# Altium PCB LISN_Mate.PcbDoc
Units mm, origin at the board's own origin, x right, y up, seen from the top; angles counter-clockwise.
Board outline 25 x 54.5 mm, 6 copper layers (Top Layer, Int1 (GND), Int2 (GND), Int3 (GND), Int4 (GND), Bottom Layer), stack 1.546 mm thick; 5 components, 5 nets, 26 pads, 1184 vias.
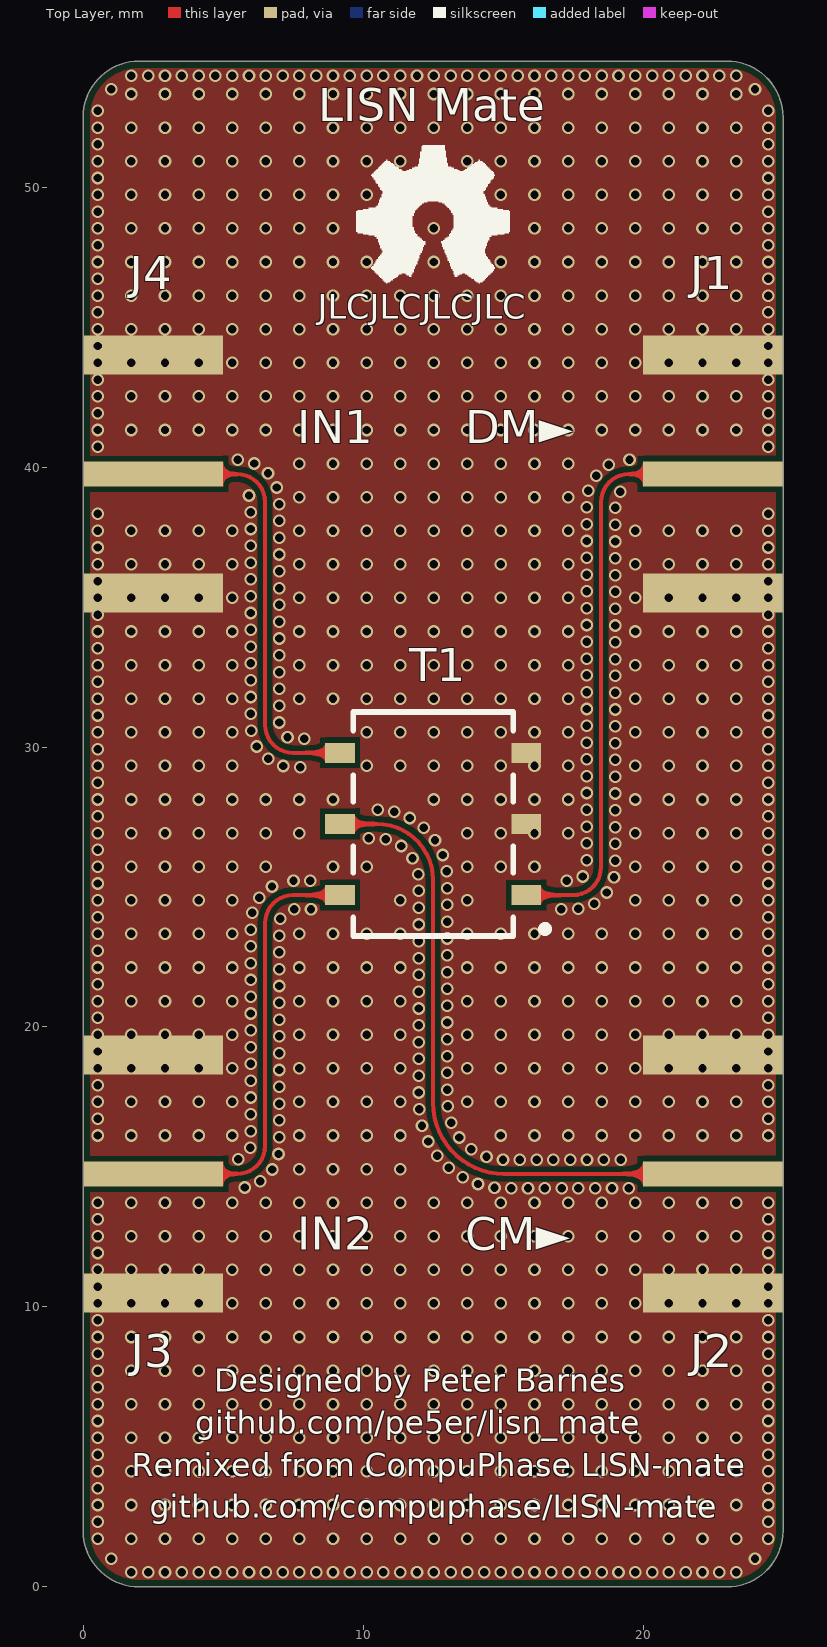
[diagram p0: Top Layer view]
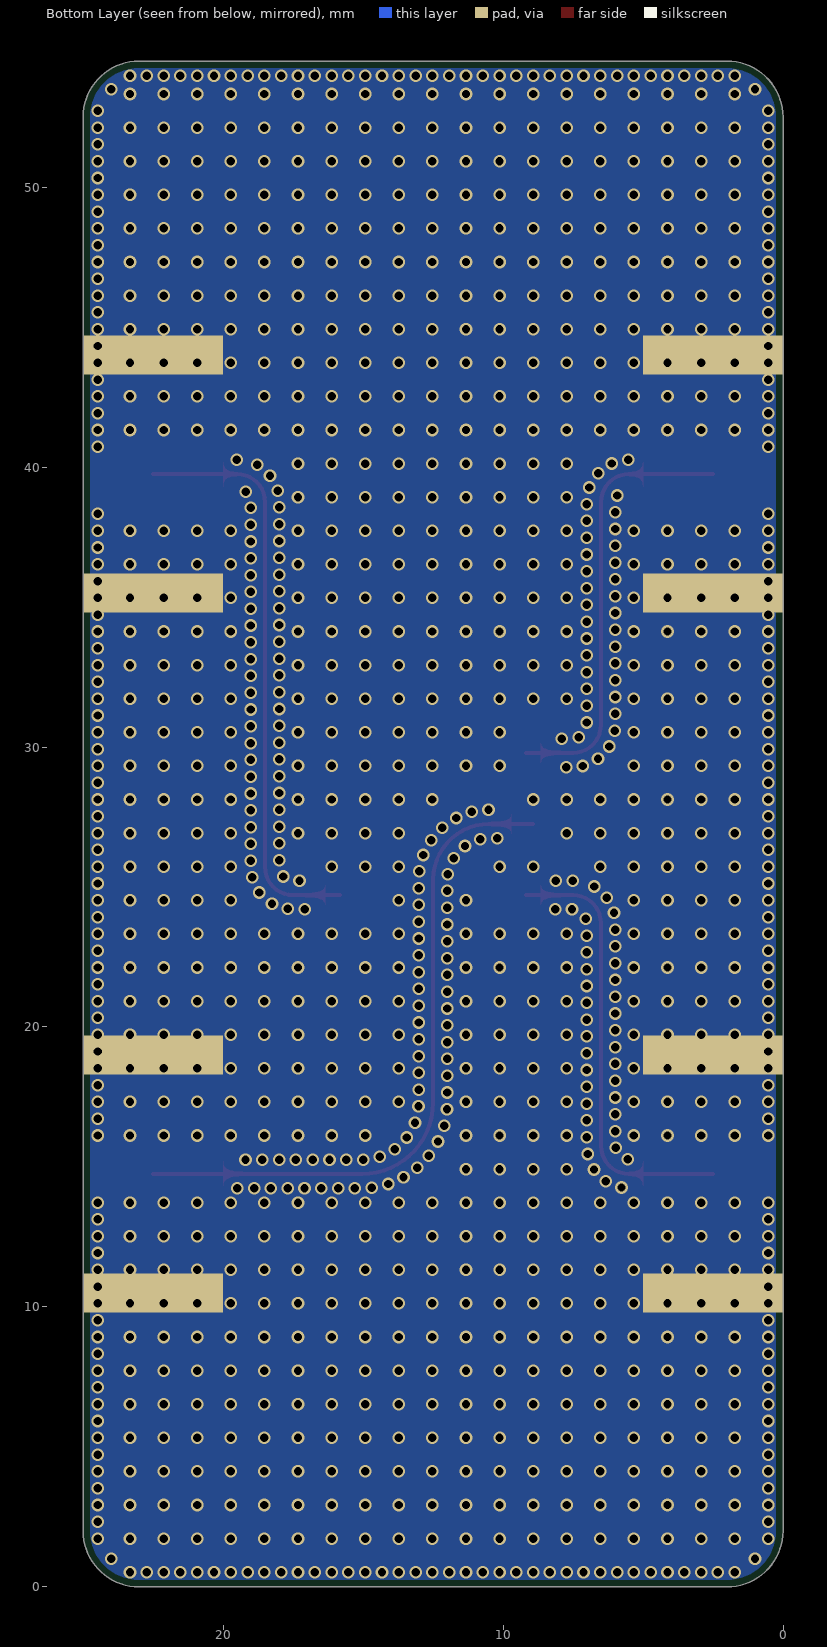
[diagram p1: Bottom Layer view, seen from below]
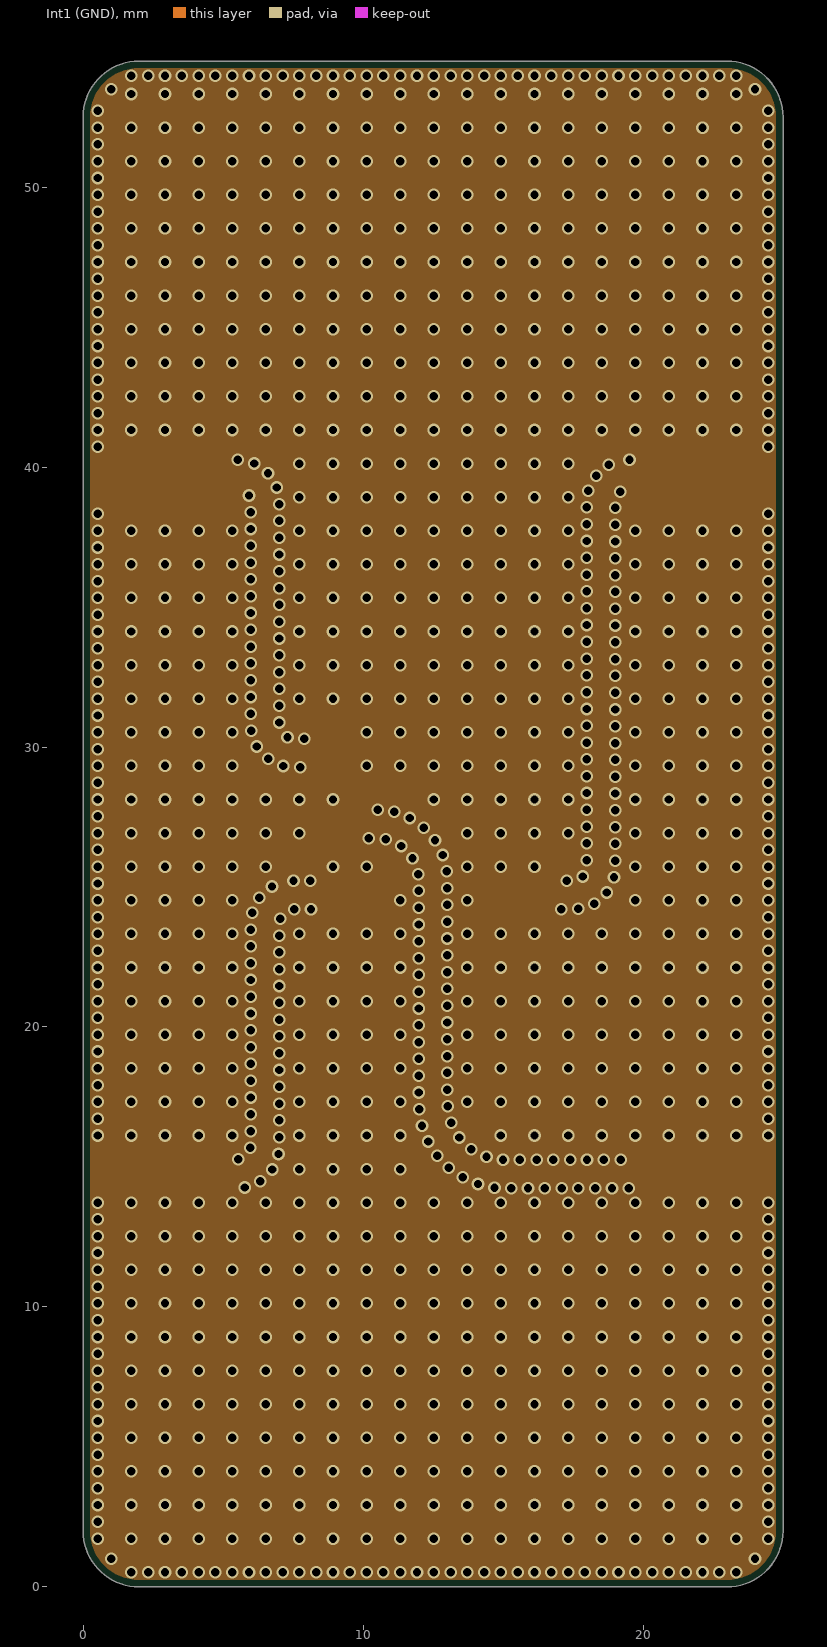
[diagram p2: Int1 (GND)]
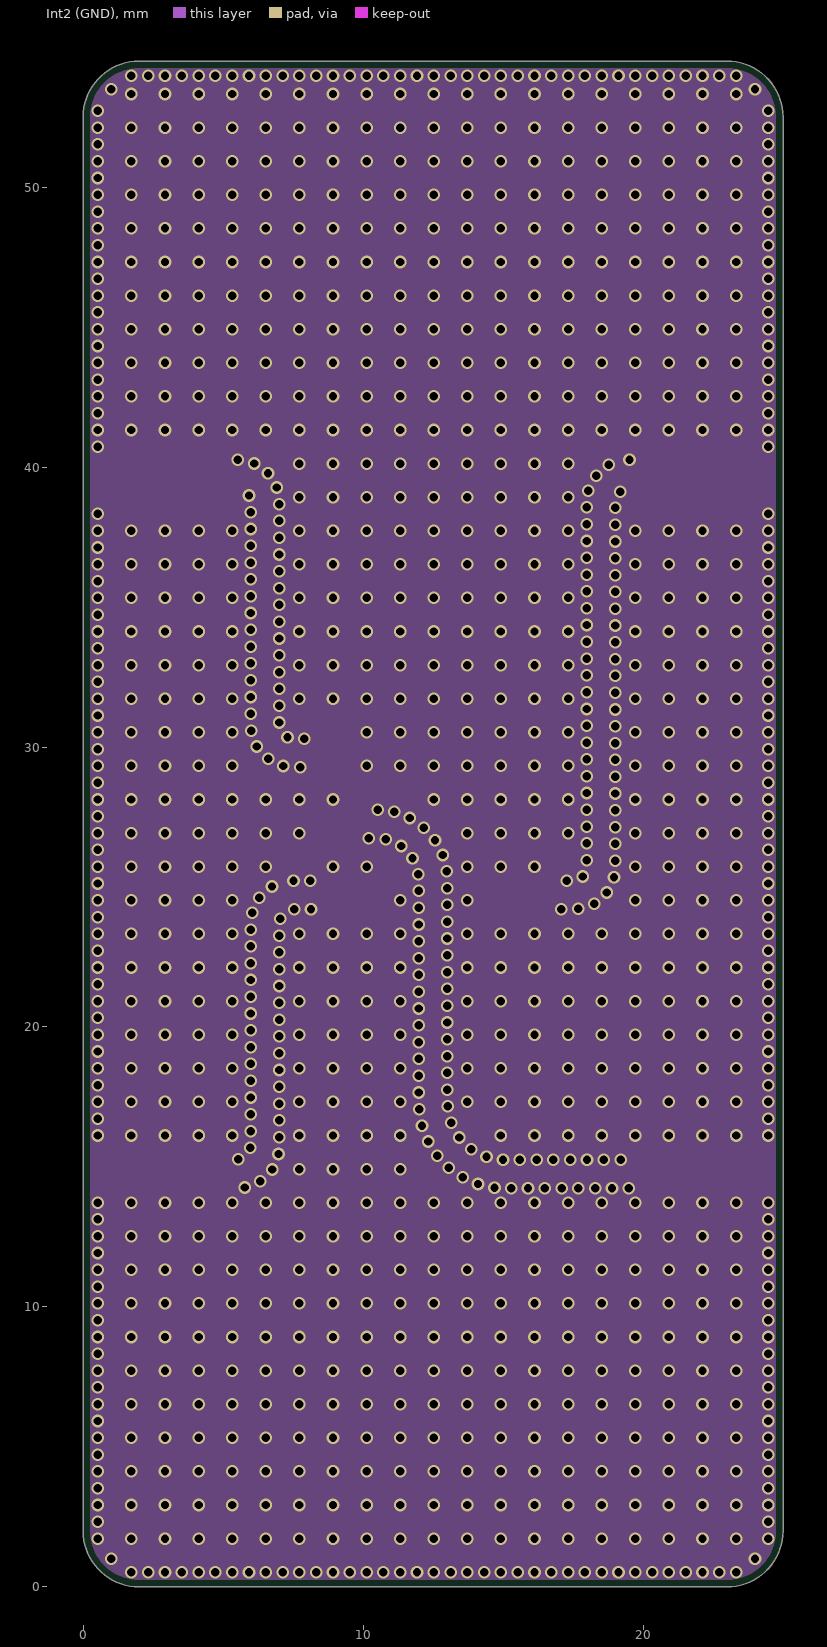
[diagram p3: Int2 (GND)]
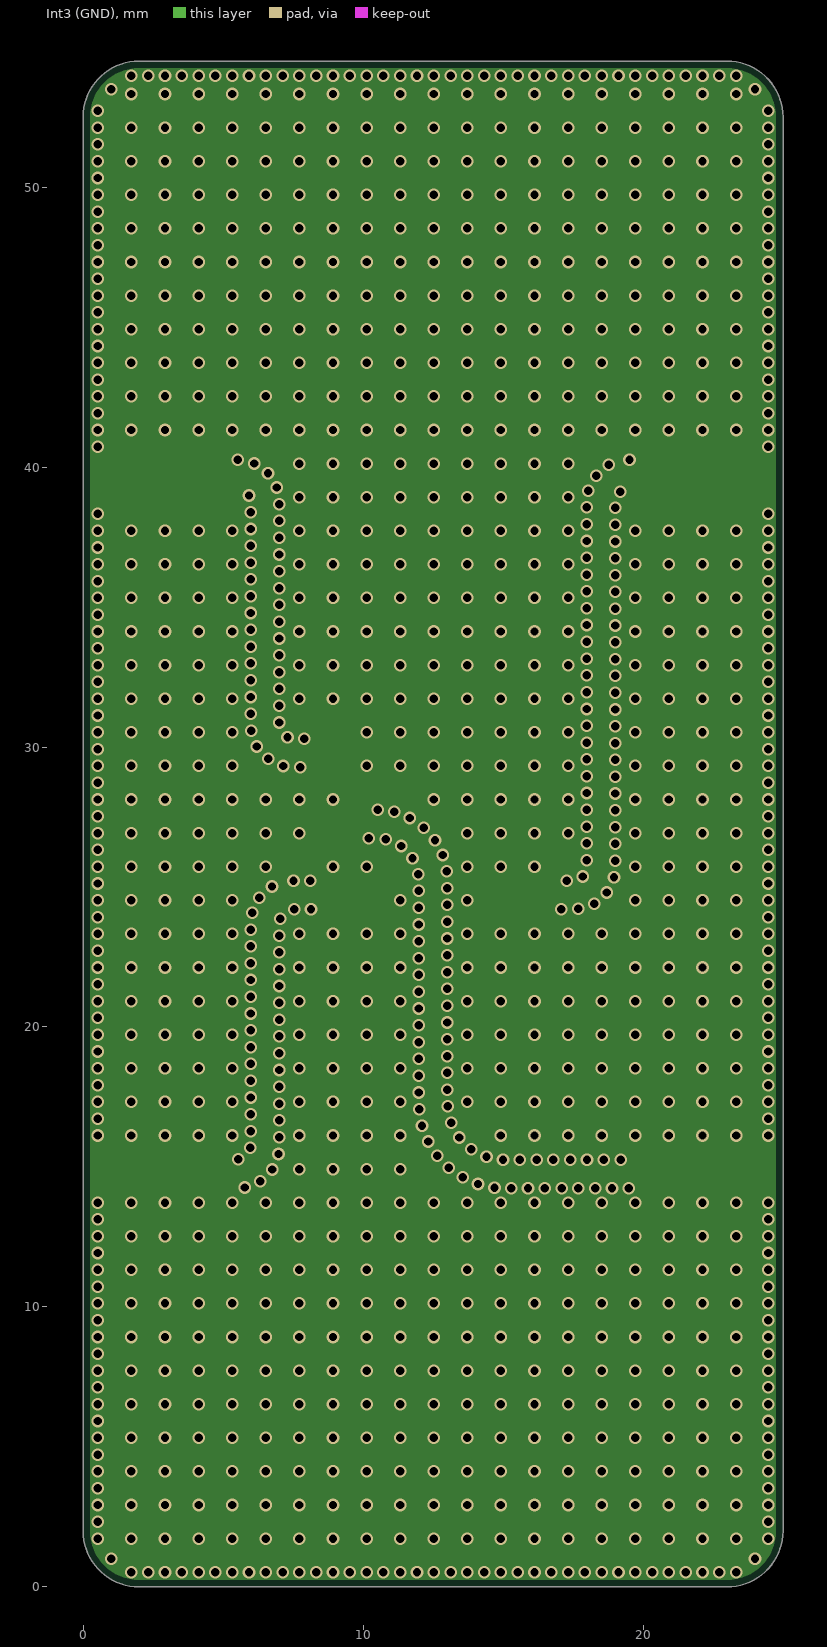
[diagram p4: Int3 (GND)]
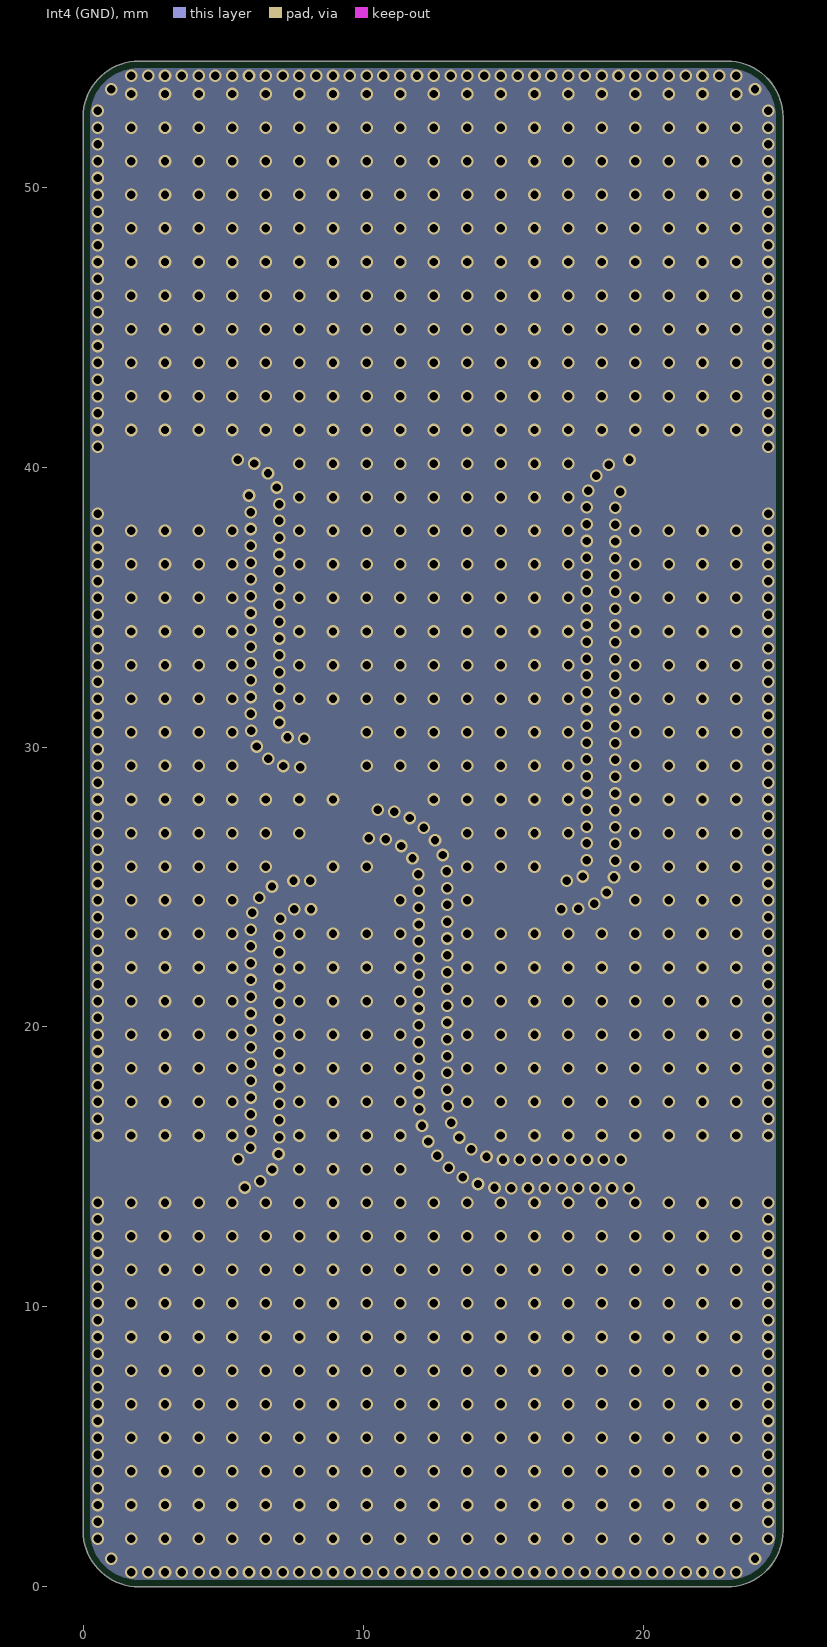
[diagram p5: Int4 (GND)]

## Layer stack, top to bottom
Top Solder: solder mask 0.0254, SM-001, Dk 4
Top Layer: signal copper 0.035
Dielectric 1: prepreg 0.0994, PP-015, Dk 4.1
Int1 (GND): signal copper 0.0152
Dielectric 3: core 0.55, Core-035, Dk 4.6
Int2 (GND): signal copper 0.0152
Dielectric 5: prepreg 0.1164, PP-017, Dk 4.16
Int3 (GND): signal copper 0.0152
Dielectric 6: core 0.55, Core-035, Dk 4.6
Int4 (GND): signal copper 0.0152
Dielectric 8: prepreg 0.0994, PP-015, Dk 4.1
Bottom Layer: signal copper 0.035
Bottom Solder: solder mask 0.0254, SM-001, Dk 4

## Board outline
2,0 cw(c2,2) 0,2 0,52.5 cw(c2,52.5) 2,54.5 23,54.5 cw(c23,52.5) 25,52.5 25,2 cw(c23,2) 23,0

## Design rules (kind name [scope] priority, off if disabled: settings)
AcuteAngle [All] p1: minimum=6.00000000000000E+0001 checktracksonly=TRUE
BackDrilling BackDrilling_GBE [InDifferentialPairClass('GBE')] p1: maxstublength=2.032 usetopbackdrill=TRUE usebottombackdrill=TRUE holeoversize=0.025 holetolplus=0 holetolminus=0
BackDrilling BackDrilling_SATA_GEN_1 [InDifferentialPairClass('SATA_GEN_1')] p2: maxstublength=2.032 usetopbackdrill=TRUE usebottombackdrill=TRUE holeoversize=0.025 holetolplus=0 holetolminus=0
BackDrilling BackDrilling_SATA_GEN_2 [InDifferentialPairClass('SATA_GEN_2')] p3: maxstublength=2.032 usetopbackdrill=TRUE usebottombackdrill=TRUE holeoversize=0.025 holetolplus=0 holetolminus=0
BackDrilling BackDrilling_SATA_GEN_3 [InDifferentialPairClass('SATA_GEN_3')] p4: maxstublength=2.032 usetopbackdrill=TRUE usebottombackdrill=TRUE holeoversize=0.025 holetolplus=0 holetolminus=0
BackDrilling BackDrilling_PCIE_GEN_3 [InDifferentialPairClass('PCIE_GEN_3')] p5: maxstublength=2.032 usetopbackdrill=TRUE usebottombackdrill=TRUE holeoversize=0.025 holetolplus=0 holetolminus=0
BackDrilling BackDrilling_PCIE_GEN_4 [InDifferentialPairClass('PCIE_GEN_4')] p6: maxstublength=0.762 usetopbackdrill=TRUE usebottombackdrill=TRUE holeoversize=0.025 holetolplus=0 holetolminus=0
BackDrilling BackDrilling_PCIE_GEN_5 [InDifferentialPairClass('PCIE_GEN_5')] p7: maxstublength=0.254 usetopbackdrill=TRUE usebottombackdrill=TRUE holeoversize=0.025 holetolplus=0 holetolminus=0
BackDrilling BackDrilling_USB_2.0 [InDifferentialPairClass('USB_2.0')] p8: maxstublength=2.032 usetopbackdrill=TRUE usebottombackdrill=TRUE holeoversize=0.025 holetolplus=0 holetolminus=0
BackDrilling BackDrilling_USB_3.2_GEN_1 [InDifferentialPairClass('USB_3.2_GEN_1')] p9: maxstublength=2.032 usetopbackdrill=TRUE usebottombackdrill=TRUE holeoversize=0.025 holetolplus=0 holetolminus=0
BackDrilling BackDrilling_USB_3.2_GEN_2 [InDifferentialPairClass('USB_3.2_GEN_2')] p10: maxstublength=0.762 usetopbackdrill=TRUE usebottombackdrill=TRUE holeoversize=0.025 holetolplus=0 holetolminus=0
BackDrilling BackDrilling_USB_4_GEN_2 [InDifferentialPairClass('USB_4_GEN_2')] p11: maxstublength=0.762 usetopbackdrill=TRUE usebottombackdrill=TRUE holeoversize=0.025 holetolplus=0 holetolminus=0
BackDrilling BackDrilling_USB_4_GEN_3 [InDifferentialPairClass('USB_4_GEN_3')] p12: maxstublength=0.254 usetopbackdrill=TRUE usebottombackdrill=TRUE holeoversize=0.025 holetolplus=0 holetolminus=0
BackDrilling BackDrilling_DP_1.2 [InDifferentialPairClass('DP_1.2')] p13: maxstublength=2.032 usetopbackdrill=TRUE usebottombackdrill=TRUE holeoversize=0.025 holetolplus=0 holetolminus=0
BackDrilling BackDrilling_DP_1.4 [InDifferentialPairClass('DP_1.4')] p14: maxstublength=0.762 usetopbackdrill=TRUE usebottombackdrill=TRUE holeoversize=0.025 holetolplus=0 holetolminus=0
BackDrilling BackDrilling_DP_2.0 [InDifferentialPairClass('DP_2.0')] p15: maxstublength=0.254 usetopbackdrill=TRUE usebottombackdrill=TRUE holeoversize=0.025 holetolplus=0 holetolminus=0
BackDrilling BackDrilling_HDMI_1.4 [InDifferentialPairClass('HDMI_1.4')] p16: maxstublength=2.032 usetopbackdrill=TRUE usebottombackdrill=TRUE holeoversize=0.025 holetolplus=0 holetolminus=0
BackDrilling BackDrilling_HDMI_2.1 [InDifferentialPairClass('HDMI_2.1')] p17: maxstublength=0.762 usetopbackdrill=TRUE usebottombackdrill=TRUE holeoversize=0.025 holetolplus=0 holetolminus=0
BoardOutlineClearance [NOT ((OnLayer('Top Overlay') OR OnLayer('Bottom Overlay')))] p1 off: gap=0.25 ignorepadtopadclearanceinfootprint=FALSE
Clearance Clearance_50R [InNet('CM') OR InNet('DM') OR InNet('IN1') OR InNet('IN2') vs InNet('GND')] p1: gap=0.2 ignorepadtopadclearanceinfootprint=TRUE
Clearance Clearance_BGA [TouchesRoom('Room_BGA_Fanout')] p2: gap=0.1 ignorepadtopadclearanceinfootprint=FALSE // Allows for necking tracks between BGA pads
Clearance Clearance_Polygon_To_Polygon [InPolygon vs InPolygon] p3: gap=0.1 ignorepadtopadclearanceinfootprint=FALSE // Clearance between polygons of different nets
Clearance Clearance_Polygon_To_All [InPolygon] p4: gap=0.15 ignorepadtopadclearanceinfootprint=FALSE // Clearance between polygons and other objects
Clearance Clearance_Mounting_Holes [InComponentClass('Mounting_Holes')] p5: gap=0.5 ignorepadtopadclearanceinfootprint=FALSE // large clearance around mounting holes that are in the Mounting_Holes component class (use a blanket on the schematic to specify this)
Clearance Clearance_Diff_Pair_Via [IsDifferentialPair AND (IsVia Or IsPad)] p6: gap=0.1 ignorepadtopadclearanceinfootprint=FALSE // should allow pads and vias on diff pairs to be as close as possible to each other, so that their anti-pads touch for tighter impedance control
Clearance Clearance_Default [All] p7: gap=0.2 ignorepadtopadclearanceinfootprint=TRUE
DiffPairsRouting Diff_PCIE [InDifferentialPairClass('PCIE*')] p1: maxlimit=0.127 minlimit=0.127 mostfreqgap=0.127 toplayer_minwidth=0.328 toplayer_maxwidth=0.328 toplayer_prefwidth=0.328 midlayer1_minwidth=0.381 midlayer1_maxwidth=0.381 midlayer1_prefwidth=0.381 midlayer2_minwidth=0.381 midlayer2_maxwidth=0.381 midlayer2_prefwidth=0.381 midlayer3_minwidth=0.381 midlayer3_maxwidth=0.381 midlayer3_prefwidth=0.381 midlayer4_minwidth=0.381 midlayer4_maxwidth=0.381 midlayer4_prefwidth=0.381 bottomlayer_minwidth=0.328 bottomlayer_maxwidth=0.328 bottomlayer_prefwidth=0.328 impedanceprofiledriven=TRUE maxuncoupledlength=12.7
DiffPairsRouting Diff_SATA [InDifferentialPairClass('SATA*')] p2: maxlimit=0.127 minlimit=0.127 mostfreqgap=0.127 toplayer_minwidth=0.328 toplayer_maxwidth=0.328 toplayer_prefwidth=0.328 midlayer1_minwidth=0.381 midlayer1_maxwidth=0.381 midlayer1_prefwidth=0.381 midlayer2_minwidth=0.381 midlayer2_maxwidth=0.381 midlayer2_prefwidth=0.381 midlayer3_minwidth=0.381 midlayer3_maxwidth=0.381 midlayer3_prefwidth=0.381 midlayer4_minwidth=0.381 midlayer4_maxwidth=0.381 midlayer4_prefwidth=0.381 bottomlayer_minwidth=0.328 bottomlayer_maxwidth=0.328 bottomlayer_prefwidth=0.328 impedanceprofiledriven=TRUE maxuncoupledlength=12.7
DiffPairsRouting Diff_HDMI [InDifferentialPairClass('HDMI*')] p3: maxlimit=0.127 minlimit=0.127 mostfreqgap=0.127 toplayer_minwidth=0.328 toplayer_maxwidth=0.328 toplayer_prefwidth=0.328 midlayer1_minwidth=0.381 midlayer1_maxwidth=0.381 midlayer1_prefwidth=0.381 midlayer2_minwidth=0.381 midlayer2_maxwidth=0.381 midlayer2_prefwidth=0.381 midlayer3_minwidth=0.381 midlayer3_maxwidth=0.381 midlayer3_prefwidth=0.381 midlayer4_minwidth=0.381 midlayer4_maxwidth=0.381 midlayer4_prefwidth=0.381 bottomlayer_minwidth=0.328 bottomlayer_maxwidth=0.328 bottomlayer_prefwidth=0.328 impedanceprofiledriven=TRUE maxuncoupledlength=12.7
DiffPairsRouting Diff_USB_2.0 [InDifferentialPairClass('USB_2.0*')] p4: maxlimit=0.127 minlimit=0.127 mostfreqgap=0.127 toplayer_minwidth=0.279 toplayer_maxwidth=0.279 toplayer_prefwidth=0.279 midlayer1_minwidth=0.381 midlayer1_maxwidth=0.381 midlayer1_prefwidth=0.381 midlayer2_minwidth=0.381 midlayer2_maxwidth=0.381 midlayer2_prefwidth=0.381 midlayer3_minwidth=0.381 midlayer3_maxwidth=0.381 midlayer3_prefwidth=0.381 midlayer4_minwidth=0.381 midlayer4_maxwidth=0.381 midlayer4_prefwidth=0.381 bottomlayer_minwidth=0.279 bottomlayer_maxwidth=0.279 bottomlayer_prefwidth=0.279 impedanceprofiledriven=TRUE maxuncoupledlength=12.7
DiffPairsRouting Diff_USB_3.2 [InDifferentialPairClass('USB_3*')] p5: maxlimit=0.127 minlimit=0.127 mostfreqgap=0.127 toplayer_minwidth=0.328 toplayer_maxwidth=0.328 toplayer_prefwidth=0.328 midlayer1_minwidth=0.381 midlayer1_maxwidth=0.381 midlayer1_prefwidth=0.381 midlayer2_minwidth=0.381 midlayer2_maxwidth=0.381 midlayer2_prefwidth=0.381 midlayer3_minwidth=0.381 midlayer3_maxwidth=0.381 midlayer3_prefwidth=0.381 midlayer4_minwidth=0.381 midlayer4_maxwidth=0.381 midlayer4_prefwidth=0.381 bottomlayer_minwidth=0.328 bottomlayer_maxwidth=0.328 bottomlayer_prefwidth=0.328 impedanceprofiledriven=TRUE maxuncoupledlength=12.7
DiffPairsRouting Diff_GBE [InDifferentialPairClass('GBE*')] p6: maxlimit=0.127 minlimit=0.127 mostfreqgap=0.127 toplayer_minwidth=0.197 toplayer_maxwidth=0.197 toplayer_prefwidth=0.197 midlayer1_minwidth=0.381 midlayer1_maxwidth=0.381 midlayer1_prefwidth=0.381 midlayer2_minwidth=0.381 midlayer2_maxwidth=0.381 midlayer2_prefwidth=0.381 midlayer3_minwidth=0.381 midlayer3_maxwidth=0.381 midlayer3_prefwidth=0.381 midlayer4_minwidth=0.381 midlayer4_maxwidth=0.381 midlayer4_prefwidth=0.381 bottomlayer_minwidth=0.197 bottomlayer_maxwidth=0.197 bottomlayer_prefwidth=0.197 impedanceprofiledriven=TRUE maxuncoupledlength=12.7
DiffPairsRouting Diff_DP [InDifferentialPairClass('DP*')] p7: maxlimit=0.127 minlimit=0.127 mostfreqgap=0.127 toplayer_minwidth=0.328 toplayer_maxwidth=0.328 toplayer_prefwidth=0.328 midlayer1_minwidth=0.381 midlayer1_maxwidth=0.381 midlayer1_prefwidth=0.381 midlayer2_minwidth=0.381 midlayer2_maxwidth=0.381 midlayer2_prefwidth=0.381 midlayer3_minwidth=0.381 midlayer3_maxwidth=0.381 midlayer3_prefwidth=0.381 midlayer4_minwidth=0.381 midlayer4_maxwidth=0.381 midlayer4_prefwidth=0.381 bottomlayer_minwidth=0.328 bottomlayer_maxwidth=0.328 bottomlayer_prefwidth=0.328 impedanceprofiledriven=TRUE maxuncoupledlength=12.7
Height [All] p1: minheight=0 maxheight=100 prefheight=12.7
HoleSize [All] p1: absolutevalues=TRUE maxlimit=5 minlimit=0.2 maxpercent=80.000 minpercent=20.000
HoleToHoleClearance [All] p1: gap=0.25 allowstackedmicrovias=TRUE
MatchedLengths Matched_xSiganls_PCIE_Pair [InxSignalClass('PCIE')] p1: tolerance=0.064 checknetsindiffpair=TRUE checkdiffpairvsdiffpair=FALSE checkxsignals=FALSE checkothers=FALSE
MatchedLengths Matched_xSignals_SATA_Pair [InxSignalClass('SATA')] p2: tolerance=0.064 checknetsindiffpair=TRUE checkdiffpairvsdiffpair=FALSE checkxsignals=FALSE checkothers=FALSE
MatchedLengths Matched_xSignals_HDMI_Pair [InxSignalClass('HDMI*')] p3: tolerance=0.064 checknetsindiffpair=TRUE checkdiffpairvsdiffpair=FALSE checkxsignals=FALSE checkothers=FALSE
MatchedLengths Matched_xSignals_HDMI_Group [InxSignalClass('HDMI*')] p4: tolerance=2.54 checknetsindiffpair=FALSE checkdiffpairvsdiffpair=TRUE checkxsignals=TRUE checkothers=TRUE
MatchedLengths Matched_xSignals_USB_2.0_Pair [InxSignalClass('USB_2.0')] p5: tolerance=0.508 checknetsindiffpair=TRUE checkdiffpairvsdiffpair=FALSE checkxsignals=FALSE checkothers=FALSE
MatchedLengths Matched_xSignals_USB_3.2_Pair [InxSignalClass('USB_3*')] p6: tolerance=0.064 checknetsindiffpair=TRUE checkdiffpairvsdiffpair=FALSE checkxsignals=FALSE checkothers=FALSE
MatchedLengths Matched_xSignals_GBE_Pair [InxSignalClass('GBE*')] p7: tolerance=0.064 checknetsindiffpair=TRUE checkdiffpairvsdiffpair=FALSE checkxsignals=FALSE checkothers=FALSE
MatchedLengths Matched_xSignals_DP_Pair [InxSignalClass('DP*')] p8: tolerance=0.064 checknetsindiffpair=TRUE checkdiffpairvsdiffpair=FALSE checkxsignals=FALSE checkothers=FALSE
MatchedLengths Matched_PCIE_Pair [InDifferentialPairClass('PCIE*') AND NOT InDifferentialPairClass('xSignals')] p9: tolerance=0.064 checknetsindiffpair=TRUE checkdiffpairvsdiffpair=FALSE checkxsignals=FALSE checkothers=FALSE // sets pair length matching requirements for PCIE, exluding any nets which are part of xSignals
MatchedLengths Matched_SATA_Pair [InDifferentialPairClass('SATA*') AND NOT InDifferentialPairClass('xSignals')] p10: tolerance=0.064 checknetsindiffpair=TRUE checkdiffpairvsdiffpair=FALSE checkxsignals=FALSE checkothers=FALSE // sets pair length matching requirements for SATA exluding any nets which are part of xSignals
MatchedLengths Matched_HDMI_Pair [InDifferentialPairClass('HDMI*') AND NOT InDifferentialPairClass('xSignals')] p11: tolerance=0.064 checknetsindiffpair=TRUE checkdiffpairvsdiffpair=FALSE checkxsignals=FALSE checkothers=FALSE // sets pair length matching requirements for HDMI exluding any nets which are part of xSignals
MatchedLengths Matched_HDMI0_Group [InDifferentialPairClass('HDMI0') AND NOT InDifferentialPairClass('xSignals')] p12: tolerance=2.54 checknetsindiffpair=FALSE checkdiffpairvsdiffpair=TRUE checkxsignals=TRUE checkothers=TRUE
MatchedLengths Matched_HDMI1_Group [InDifferentialPairClass('HDMI1') AND NOT InDifferentialPairClass('xSignals')] p13: tolerance=2.54 checknetsindiffpair=FALSE checkdiffpairvsdiffpair=TRUE checkxsignals=TRUE checkothers=TRUE
MatchedLengths Matched_HDMI2_Group [InDifferentialPairClass('HDMI2') AND NOT InDifferentialPairClass('xSignals')] p14: tolerance=2.54 checknetsindiffpair=FALSE checkdiffpairvsdiffpair=TRUE checkxsignals=TRUE checkothers=TRUE
MatchedLengths Matched_HDMI3_Group [InDifferentialPairClass('HDMI3') AND NOT InDifferentialPairClass('xSignals')] p15: tolerance=2.54 checknetsindiffpair=FALSE checkdiffpairvsdiffpair=TRUE checkxsignals=TRUE checkothers=TRUE
MatchedLengths Matched_USB_2.0_Pair [InDifferentialPairClass('USB_2.0') AND NOT InDifferentialPairClass('xSignals')] p16: tolerance=0.508 checknetsindiffpair=TRUE checkdiffpairvsdiffpair=FALSE checkxsignals=FALSE checkothers=FALSE // sets pair length matching requirements for USB 2.0 exluding any nets which are part of xSignals
MatchedLengths Matched_USB_3.2_Pair [InDifferentialPairClass('USB_3*') AND NOT InDifferentialPairClass('xSignals')] p17: tolerance=0.064 checknetsindiffpair=TRUE checkdiffpairvsdiffpair=FALSE checkxsignals=FALSE checkothers=FALSE // sets pair length matching requirements for USB 3.x exluding any nets which are part of xSignals
MatchedLengths Matched_GBE_Pair [InDifferentialPairClass('GBE*') AND NOT InDifferentialPairClass('xSignals')] p18: tolerance=0.127 checknetsindiffpair=TRUE checkdiffpairvsdiffpair=FALSE checkxsignals=FALSE checkothers=FALSE // sets pair length matching requirements for GBE exluding any nets which are part of xSignals
MatchedLengths Matched_GBE0_Group [InDifferentialPairClass('GBE0')] p19: tolerance=12.7 checknetsindiffpair=FALSE checkdiffpairvsdiffpair=TRUE checkxsignals=TRUE checkothers=TRUE
MatchedLengths Matched_GBE1_Group [InDifferentialPairClass('GBE1')] p20: tolerance=12.7 checknetsindiffpair=FALSE checkdiffpairvsdiffpair=TRUE checkxsignals=TRUE checkothers=TRUE
MatchedLengths Matched_GBE2_Group [InDifferentialPairClass('GBE2')] p21: tolerance=12.7 checknetsindiffpair=FALSE checkdiffpairvsdiffpair=TRUE checkxsignals=TRUE checkothers=TRUE
MatchedLengths Matched_GBE3_Group [InDifferentialPairClass('GBE3')] p22: tolerance=12.7 checknetsindiffpair=FALSE checkdiffpairvsdiffpair=TRUE checkxsignals=TRUE checkothers=TRUE
MatchedLengths Matched_DP_Pair [InDifferentialPairClass('DP*') AND NOT InDifferentialPairClass('xSignals')] p23: tolerance=0.064 checknetsindiffpair=TRUE checkdiffpairvsdiffpair=FALSE checkxsignals=FALSE checkothers=FALSE // sets pair length matching requirements for DP exluding any nets which are part of xSignals
MatchedLengths Matched_DP0_Group [InDifferentialPairClass('DP0')] p24: tolerance=2.54 checknetsindiffpair=FALSE checkdiffpairvsdiffpair=TRUE checkxsignals=TRUE checkothers=TRUE
MatchedLengths Matched_DP1_Group [InDifferentialPairClass('DP1')] p25: tolerance=2.54 checknetsindiffpair=FALSE checkdiffpairvsdiffpair=TRUE checkxsignals=TRUE checkothers=TRUE
MatchedLengths Matched_DP2_Group [InDifferentialPairClass('DP2')] p26: tolerance=2.54 checknetsindiffpair=FALSE checkdiffpairvsdiffpair=TRUE checkxsignals=TRUE checkothers=TRUE
MatchedLengths Matched_DP3_Group [InDifferentialPairClass('DP3')] p27: tolerance=2.54 checknetsindiffpair=FALSE checkdiffpairvsdiffpair=TRUE checkxsignals=TRUE checkothers=TRUE
MinimumAnnularRing [All] p1: minimumring=0.05
MinimumSolderMaskSliver [All] p1: minsoldermaskwidth=0.1
PlaneClearance [All] p1: clearance=0.4
PlaneConnect PlaneConnect_Power [InComponentClass('Power_Ties')] p1: pad.planeconnectstyle=Relief pad.reliefexpansion=0.5 pad.reliefentries=4 pad.reliefconductorwidth=0.4 pad.reliefairgap=0.25 via.planeconnectstyle=Direct via.reliefexpansion=0.508 via.reliefentries=4 via.reliefconductorwidth=0.254 via.reliefairgap=0.254 // thicker ties for high power components
PlaneConnect PlaneConnect_Default [All] p2: pad.planeconnectstyle=Relief pad.reliefexpansion=0.3 pad.reliefentries=4 pad.reliefconductorwidth=0.2 pad.reliefairgap=0.2 via.planeconnectstyle=Direct via.reliefexpansion=0.508 via.reliefentries=4 via.reliefconductorwidth=0.254 via.reliefairgap=0.254
PolygonConnect PolygonConnect_Power [InComponentClass('Power_Ties')] p1: thpad.connectstyle=Relief thpad.reliefconductorwidth=1 thpad.reliefentries=4 thpad.polygonreliefangle="90 Angle" thpad.airgapwidth=0.25 smdpad.connectstyle=Relief smdpad.reliefconductorwidth=1 smdpad.reliefentries=4 smdpad.polygonreliefangle="90 Angle" smdpad.airgapwidth=0.25 via.connectstyle=Direct via.reliefconductorwidth=0.254 via.reliefentries=4 via.polygonreliefangle="90 Angle" via.airgapwidth=0.254
PolygonConnect PolygonConnect_Default [All] p2: connectstyle=Direct reliefconductorwidth=0.25 reliefentries=4 polygonreliefangle="90 Angle" airgapwidth=0.25
RoutingVias Via_BGA [TouchesRoom('Room_BGA_Fanout')] p1: holewidth=0.3 width=0.6 viastyle="Through Hole" minholewidth=0.2 minwidth=0.45 maxholewidth=0.4 maxwidth=0.7
RoutingVias Via_Diff_Pair [IsDifferentialPair] p2: holewidth=0.4 width=0.7 viastyle="Through Hole" minholewidth=0.2 minwidth=0.45 maxholewidth=0.7 maxwidth=1
RoutingVias Via_Default [All] p3: holewidth=0.7 width=1 viastyle="Through Hole" minholewidth=0.4 minwidth=0.7 maxholewidth=1 maxwidth=1.4
SMDEntry [All] p1: side=TRUE corner=TRUE anyangle=FALSE
SMDToPlane [InNet('GND')] p1: distance=1181102 // Ensures that all ground pads are close to vias
SilkToSilkClearance [All] p1: silktosilkclearance=0.1
SilkToSolderMaskClearance [IsPad] p1: minsilkscreentomaskgap=0.1 clearancetoexposedcopper=TRUE
SolderMaskExpansion SolderMaskExpansion_Vias [IsVia] p1: expansion=0.102 istentingtop=TRUE
SolderMaskExpansion SolderMaskExpansion_Default [All] p2: expansion=0.075 istentingtop=FALSE
SupplyNets "Schematic Supply Nets" [InNet('GND')] p1: voltage=0.000
UnRoutedNet [Not TouchesRoom('LayerMarkers')] p1: checkbadconnections=TRUE
Width Width_50R [InNet('CM') OR InNet('DM') OR InNet('IN1') OR InNet('IN2')] p1: maxlimit=0.254 minlimit=0.144 preferedwidth=0.254 toplayer_maxwidth=0.144 toplayer_prefwidth=0.144 bottomlayer_maxwidth=0.144 bottomlayer_prefwidth=0.144 impedanceprofiledriven=TRUE impedanceprofileid={3C842658-E829-48D1-960B-07CAC91FAB22} impedanceprofilevalue=50.000000 minimp=50.000000 maximp=50.000000 favimp=50.000000
Width Width_BGA [TouchesRoom('Room_BGA_Fanout')] p2: maxlimit=10 minlimit=0.1 preferedwidth=0.2 // allows necking between BGA pads
Width Width_Diff_Pair [IsDifferentialPair] p3: maxlimit=10 minlimit=0.1 preferedwidth=0.2 // stops altium complaining if diff pair tracks are narrow
Width Width_Power [InNetClass('Power')] p4: maxlimit=10 minlimit=0.3 preferedwidth=0.5 // thicker tracks for power nets. Use a blanket or parameter sets to put power traces in the 'Power' net class
Width Width_Default [All] p5: maxlimit=10 minlimit=0.2 preferedwidth=0.4
20 further rules are at their usual default settings.

## Components (designator, comment, footprint, x,y, rotation, side; value= is the part's Value field where it differs from the comment)
J1 "60312242114510" 60312242114510 32.175,39.75 r90 top locked
J2 "60312242114510" 60312242114510 32.175,14.75 r90 top locked
J3 "60312242114510" 60312242114510 -7.175,14.75 r270 top locked
J4 "60312242114510" 60312242114510 -7.175,39.75 r270 top locked
T1 "ADT1-6T+" FP-CD637 12.5,27.25 r90 top locked

## Footprints (in the part's own frame and the unit in brackets; to place one, negate y for a bottom-side part, rotate by r counter-clockwise, add the part's x,y. Pads: shape width x height; smd on the part's side, far side on the other; paste and mask are expansions set on the pad)
60312242114510 [mm]
  rect 0.9x5 smd: 1(0,9.675)
  rect 1.4x5 smd: 2(-4.25,9.675) 2(4.25,9.675)
  rect 1.4x5 smd far side: 2(-4.25,9.675) 2(4.25,9.675)
  body extent -5.1,-5.53 5.1,11.93, height 5.5
FP-CD637 [mm]
  rect 0.712x1.06 smd paste+0 mask+0: 1(-2.54,-3.324) 2(0,-3.324) 3(2.54,-3.324) 4(2.54,3.324) 5(0,3.324) 6(-2.54,3.324)
  silkscreen extent -4,-4.13 4,2.86, body extent -4.1,-3.91 4.1,3.91, height 0.25

## Part data
J1 J2 J3 J4: "Connector - SMA Socket, Right-Angle, PCB Edge Mount, 50 ohm", RoHS Compliant=Yes
T1: "RF Transformer - ADT1-6T+", RoHS Compliant=Yes, Turns Ratio=1:1

## Via types
v1: diameter 0.45, hole 0.3, Top Layer to Bottom Layer, tented both sides, 1184 vias

## Nets (pads, with @x,y where several pads share a name; then routed paths per layer and width w, separated by ;. In a path a pad name is that pad's centre, name@x,y a point inside that pad or via, vN(x,y) a via of type N, cw(c..) or ccw(c..) an arc to the next point about the centre after c; other vN are vias at no path point)
CM: J2.1 T1.5 | length 24.1
  Top Layer w0.144: T1.5@8.926,27.25 10.5,27.25 cw(c10.5,25.25) 12.5,25.269 12.5,17.29 ccw(c15.04,17.29) 15.04,14.75 J2.1
DM: J1.1 T1.1 | length 20.9
  Top Layer w0.144: T1.1 17.5,24.71 ccw(c17.5,25.71) 18.5,25.71 18.5,38.75 cw(c19.5,38.75) 19.5,39.75 J1.1
GND: J1.2 J2.2 J3.2 J4.2 T1.2 T1.3
  other v1: 1.725,0.525 2.325,0.525 2.925,0.525 3.525,0.525 4.125,0.525 4.725,0.525 5.325,0.525 5.925,0.525 6.525,0.525 7.125,0.525 7.725,0.525 8.325,0.525 8.925,0.525 9.525,0.525 10.125,0.525 10.725,0.525 11.325,0.525 11.925,0.525 12.525,0.525 13.125,0.525 13.725,0.525 14.325,0.525 14.925,0.525 15.525,0.525 16.125,0.525 16.725,0.525 17.325,0.525 17.925,0.525 18.525,0.525 19.125,0.525 19.725,0.525 20.325,0.525 20.925,0.525 21.525,0.525 22.125,0.525 22.725,0.525 23.325,0.525 1,1 24,1 0.525,1.725 1.725,1.725 2.925,1.725 4.125,1.725 5.325,1.725 6.525,1.725 7.725,1.725 8.925,1.725 10.125,1.725 11.325,1.725 12.525,1.725 13.725,1.725 14.925,1.725 16.125,1.725 17.325,1.725 18.525,1.725 19.725,1.725 20.925,1.725 22.125,1.725 23.325,1.725 24.475,1.725 0.525,2.325 24.475,2.325 0.525,2.925 1.725,2.925 2.925,2.925 4.125,2.925 5.325,2.925 6.525,2.925 7.725,2.925 8.925,2.925 10.125,2.925 11.325,2.925 12.525,2.925 13.725,2.925 14.925,2.925 16.125,2.925 17.325,2.925 18.525,2.925 19.725,2.925 20.925,2.925 22.125,2.925 23.325,2.925 24.475,2.925 0.525,3.525 24.475,3.525 0.525,4.125 1.725,4.125 2.925,4.125 4.125,4.125 5.325,4.125 6.525,4.125 7.725,4.125 8.925,4.125 10.125,4.125 11.325,4.125 12.525,4.125 13.725,4.125 14.925,4.125 16.125,4.125 17.325,4.125 18.525,4.125 19.725,4.125 20.925,4.125 22.125,4.125 23.325,4.125 24.475,4.125 0.525,4.725 24.475,4.725 0.525,5.325 1.725,5.325 2.925,5.325 4.125,5.325 5.325,5.325 6.525,5.325 7.725,5.325 8.925,5.325 10.125,5.325 11.325,5.325 12.525,5.325 13.725,5.325 14.925,5.325 16.125,5.325 17.325,5.325 18.525,5.325 19.725,5.325 20.925,5.325 22.125,5.325 23.325,5.325 24.475,5.325 0.525,5.925 24.475,5.925 0.525,6.525 1.725,6.525 2.925,6.525 4.125,6.525 5.325,6.525 6.525,6.525 7.725,6.525 8.925,6.525 10.125,6.525 11.325,6.525 12.525,6.525 13.725,6.525 14.925,6.525 16.125,6.525 17.325,6.525 18.525,6.525 19.725,6.525 20.925,6.525 22.125,6.525 23.325,6.525 24.475,6.525 0.525,7.125 24.475,7.125 0.525,7.725 1.725,7.725 2.925,7.725 4.125,7.725 5.325,7.725 6.525,7.725 7.725,7.725 8.925,7.725 10.125,7.725 11.325,7.725 12.525,7.725 13.725,7.725 14.925,7.725 16.125,7.725 17.325,7.725 18.525,7.725 19.725,7.725 20.925,7.725 22.125,7.725 23.325,7.725 24.475,7.725 0.525,8.325 24.475,8.325 0.525,8.925 1.725,8.925 2.925,8.925 4.125,8.925 5.325,8.925 6.525,8.925 7.725,8.925 8.925,8.925 10.125,8.925 11.325,8.925 12.525,8.925 13.725,8.925 14.925,8.925 16.125,8.925 17.325,8.925 18.525,8.925 19.725,8.925 20.925,8.925 22.125,8.925 23.325,8.925 24.475,8.925 0.525,9.525 24.475,9.525 0.525,10.125 1.725,10.125 2.925,10.125 4.125,10.125 5.325,10.125 6.525,10.125 7.725,10.125 8.925,10.125 10.125,10.125 11.325,10.125 12.525,10.125 13.725,10.125 14.925,10.125 16.125,10.125 17.325,10.125 18.525,10.125 19.725,10.125 20.925,10.125 22.125,10.125 23.325,10.125 24.475,10.125 0.525,10.725 24.475,10.725 0.525,11.325 1.725,11.325 2.925,11.325 4.125,11.325 5.325,11.325 6.525,11.325 7.725,11.325 8.925,11.325 10.125,11.325 11.325,11.325 12.525,11.325 13.725,11.325 14.925,11.325 16.125,11.325 17.325,11.325 18.525,11.325 19.725,11.325 20.925,11.325 22.125,11.325 23.325,11.325 24.475,11.325 0.525,11.925 24.475,11.925 0.525,12.525 1.725,12.525 2.925,12.525 4.125,12.525 5.325,12.525 6.525,12.525 7.725,12.525 8.925,12.525 10.125,12.525 11.325,12.525 12.525,12.525 13.725,12.525 14.925,12.525 16.125,12.525 17.325,12.525 18.525,12.525 19.725,12.525 20.925,12.525 22.125,12.525 23.325,12.525 24.475,12.525 0.525,13.125 24.475,13.125 0.525,13.725 1.725,13.725 2.925,13.725 4.125,13.725 5.325,13.725 6.525,13.725 7.725,13.725 8.925,13.725 10.125,13.725 11.325,13.725 12.525,13.725 13.725,13.725 14.925,13.725 16.125,13.725 17.325,13.725 18.525,13.725 19.725,13.725 20.925,13.725 22.125,13.725 23.325,13.725 24.475,13.725 15.293,14.239 15.893,14.239 16.493,14.239 17.093,14.239 17.693,14.239 18.293,14.239 18.893,14.239 19.493,14.239 5.768,14.267 14.693,14.264 14.107,14.391 6.327,14.487 13.557,14.63 6.752,14.909 7.725,14.925 8.925,14.925 10.125,14.925 11.325,14.925 13.064,14.972 5.539,15.269 14.999,15.262 15.599,15.261 16.199,15.261 16.799,15.261 17.399,15.261 17.999,15.261 18.599,15.261 19.199,15.261 14.409,15.369 12.648,15.405 6.981,15.464 13.871,15.634 5.977,15.68 12.325,15.91 7.011,16.064 13.44,16.052 0.525,16.125 1.725,16.125 2.925,16.125 4.125,16.125 5.325,16.125 7.725,16.125 8.925,16.125 10.125,16.125 11.325,16.125 14.925,16.125 16.125,16.125 17.325,16.125 18.525,16.125 19.725,16.125 20.925,16.125 22.125,16.125 23.325,16.125 24.475,16.125 5.989,16.28 12.107,16.469 13.144,16.574 7.011,16.664 0.525,16.725 24.475,16.725 5.989,16.88 12.003,17.06 13.021,17.161 7.011,17.264 0.525,17.325 1.725,17.325 2.925,17.325 4.125,17.325 5.325,17.325 7.725,17.325 8.925,17.325 10.125,17.325 11.325,17.325 13.725,17.325 14.925,17.325 16.125,17.325 17.325,17.325 18.525,17.325 19.725,17.325 20.925,17.325 22.125,17.325 23.325,17.325 24.475,17.325 5.989,17.48 11.989,17.66 13.011,17.761 7.011,17.864 0.525,17.925 24.475,17.925 5.989,18.08 11.989,18.26 13.011,18.361 7.011,18.464 0.525,18.525 1.725,18.525 2.925,18.525 4.125,18.525 5.325,18.525 7.725,18.525 8.925,18.525 10.125,18.525 11.325,18.525 13.725,18.525 14.925,18.525 16.125,18.525 17.325,18.525 18.525,18.525 19.725,18.525 20.925,18.525 22.125,18.525 23.325,18.525 24.475,18.525 5.989,18.68 11.989,18.86 13.011,18.961 7.011,19.064 0.525,19.125 24.475,19.125 5.989,19.28 11.989,19.46 13.011,19.561 7.011,19.664 0.525,19.725 1.725,19.725 2.925,19.725 4.125,19.725 5.325,19.725 7.725,19.725 8.925,19.725 10.125,19.725 11.325,19.725 13.725,19.725 14.925,19.725 16.125,19.725 17.325,19.725 18.525,19.725 19.725,19.725 20.925,19.725 22.125,19.725 23.325,19.725 24.475,19.725 5.989,19.88 11.989,20.06 13.011,20.161 7.011,20.264 0.525,20.325 24.475,20.325 5.989,20.48 11.989,20.66 13.011,20.761 7.011,20.864 0.525,20.925 1.725,20.925 2.925,20.925 4.125,20.925 5.325,20.925 7.725,20.925 8.925,20.925 10.125,20.925 11.325,20.925 13.725,20.925 14.925,20.925 16.125,20.925 17.325,20.925 18.525,20.925 19.725,20.925 20.925,20.925 22.125,20.925 23.325,20.925 24.475,20.925 5.989,21.08 11.989,21.26 13.011,21.361 7.011,21.464 0.525,21.525 24.475,21.525 5.989,21.68 11.989,21.86 13.011,21.961 7.011,22.064 0.525,22.125 1.725,22.125 2.925,22.125 4.125,22.125 5.325,22.125 7.725,22.125 8.925,22.125 10.125,22.125 11.325,22.125 13.725,22.125 14.925,22.125 16.125,22.125 17.325,22.125 18.525,22.125 19.725,22.125 20.925,22.125 22.125,22.125 23.325,22.125 24.475,22.125 5.989,22.28 11.989,22.46 13.011,22.561 7.011,22.664 0.525,22.725 24.475,22.725 5.989,22.88 11.989,23.06 13.011,23.161 7.011,23.264 0.525,23.325 1.725,23.325 2.925,23.325 4.125,23.325 5.325,23.325 7.725,23.325 8.925,23.325 10.125,23.325 11.325,23.325 13.725,23.325 14.925,23.325 16.125,23.325 17.325,23.325 18.525,23.325 19.725,23.325 20.925,23.325 22.125,23.325 23.325,23.325 24.475,23.325 5.989,23.48 11.989,23.66 13.011,23.761 7.042,23.863 0.525,23.925 24.475,23.925 6.037,24.078 7.539,24.199 8.139,24.199 17.084,24.199 17.684,24.216 11.989,24.26 13.011,24.361 18.253,24.404 0.525,24.525 1.725,24.525 2.925,24.525 4.125,24.525 5.325,24.525 11.325,24.525 13.725,24.525 19.725,24.525 20.925,24.525 22.125,24.525 23.325,24.525 24.475,24.525 6.299,24.617 18.702,24.803 11.989,24.86 13.011,24.961 6.747,25.016 0.525,25.125 24.475,25.125 7.517,25.221 8.117,25.221 17.27,25.221 18.964,25.343 17.85,25.375 11.969,25.459 12.987,25.561 0.525,25.725 1.725,25.725 2.925,25.725 4.125,25.725 5.325,25.725 6.525,25.725 8.925,25.725 10.125,25.725 13.725,25.725 14.925,25.725 16.125,25.725 19.725,25.725 20.925,25.725 22.125,25.725 23.325,25.725 24.475,25.725 19.011,25.941 17.989,25.959 11.766,26.024 12.847,26.144 0.525,26.325 24.475,26.325 11.357,26.463 19.011,26.541 17.989,26.559 12.569,26.676 10.808,26.705 10.209,26.739 0.525,26.925 1.725,26.925 2.925,26.925 4.125,26.925 5.325,26.925 6.525,26.925 7.725,26.925 13.725,26.925 14.925,26.925 16.125,26.925 17.325,26.925 19.725,26.925 20.925,26.925 22.125,26.925 23.325,26.925 24.475,26.925 12.168,27.122 17.989,27.159 19.011,27.141 11.674,27.463 0.525,27.525 24.475,27.525 11.115,27.681 19.011,27.741 10.521,27.761 17.989,27.759 0.525,28.125 1.725,28.125 2.925,28.125 4.125,28.125 5.325,28.125 6.525,28.125 7.725,28.125 8.925,28.125 12.525,28.125 13.725,28.125 14.925,28.125 16.125,28.125 17.325,28.125 19.725,28.125 20.925,28.125 22.125,28.125 23.325,28.125 24.475,28.125 17.989,28.359 19.011,28.341 0.525,28.725 24.475,28.725 19.011,28.941 17.989,28.959 7.749,29.279 7.151,29.32 0.525,29.325 1.725,29.325 2.925,29.325 4.125,29.325 5.325,29.325 10.125,29.325 11.325,29.325 12.525,29.325 13.725,29.325 14.925,29.325 16.125,29.325 17.325,29.325 19.725,29.325 20.925,29.325 22.125,29.325 23.325,29.325 24.475,29.325 19.011,29.541 6.608,29.577 17.989,29.559 0.525,29.925 24.475,29.925 6.203,30.019 17.989,30.159 19.011,30.141 7.899,30.301 7.301,30.351 0.525,30.525 1.725,30.525 2.925,30.525 4.125,30.525 5.325,30.525 10.125,30.525 11.325,30.525 12.525,30.525 13.725,30.525 14.925,30.525 16.125,30.525 17.325,30.525 19.725,30.525 20.925,30.525 22.125,30.525 23.325,30.525 24.475,30.525 6.008,30.587 19.011,30.741 17.989,30.759 7.011,30.876 0.525,31.125 24.475,31.125 5.989,31.187 19.011,31.341 17.989,31.359 7.011,31.476 0.525,31.725 1.725,31.725 2.925,31.725 4.125,31.725 5.325,31.725 7.725,31.725 8.925,31.725 10.125,31.725 11.325,31.725 12.525,31.725 13.725,31.725 14.925,31.725 16.125,31.725 17.325,31.725 19.725,31.725 20.925,31.725 22.125,31.725 23.325,31.725 24.475,31.725 5.989,31.787 17.989,31.959 19.011,31.941 7.011,32.076 0.525,32.325 24.475,32.325 5.989,32.387 19.011,32.541 17.989,32.559 7.011,32.676 0.525,32.925 1.725,32.925 2.925,32.925 4.125,32.925 5.325,32.925 7.725,32.925 8.925,32.925 10.125,32.925 11.325,32.925 12.525,32.925 13.725,32.925 14.925,32.925 16.125,32.925 17.325,32.925 19.725,32.925 20.925,32.925 22.125,32.925 23.325,32.925 24.475,32.925 5.989,32.987 17.989,33.159 19.011,33.141 7.011,33.276 0.525,33.525 24.475,33.525 5.989,33.587 19.011,33.741 17.989,33.759 7.011,33.876 0.525,34.125 1.725,34.125 2.925,34.125 4.125,34.125 5.325,34.125 7.725,34.125 8.925,34.125 10.125,34.125 11.325,34.125 12.525,34.125 13.725,34.125 14.925,34.125 16.125,34.125 17.325,34.125 19.725,34.125 20.925,34.125 22.125,34.125 23.325,34.125 24.475,34.125 5.989,34.187 19.011,34.341 17.989,34.359 7.011,34.476 0.525,34.725 24.475,34.725 5.989,34.787 17.989,34.959 19.011,34.941 7.011,35.076 0.525,35.325 1.725,35.325 2.925,35.325 4.125,35.325 5.325,35.325 7.725,35.325 8.925,35.325 10.125,35.325 11.325,35.325 12.525,35.325 13.725,35.325 14.925,35.325 16.125,35.325 17.325,35.325 19.725,35.325 20.925,35.325 22.125,35.325 23.325,35.325 24.475,35.325 5.989,35.387 19.011,35.541 17.989,35.559 7.011,35.676 0.525,35.925 24.475,35.925 5.989,35.987 19.011,36.141 17.989,36.159 7.011,36.276 0.525,36.525 1.725,36.525 2.925,36.525 4.125,36.525 5.325,36.525 7.725,36.525 8.925,36.525 10.125,36.525 11.325,36.525 12.525,36.525 13.725,36.525 14.925,36.525 16.125,36.525 17.325,36.525 19.725,36.525 20.925,36.525 22.125,36.525 23.325,36.525 24.475,36.525 5.989,36.587 17.989,36.759 19.011,36.741 7.011,36.876 0.525,37.125 24.475,37.125 5.989,37.187 19.011,37.341 17.989,37.359 7.011,37.476 0.525,37.725 1.725,37.725 2.925,37.725 4.125,37.725 5.325,37.725 7.725,37.725 8.925,37.725 10.125,37.725 11.325,37.725 12.525,37.725 13.725,37.725 14.925,37.725 16.125,37.725 17.325,37.725 19.725,37.725 20.925,37.725 22.125,37.725 23.325,37.725 24.475,37.725 5.989,37.787 17.989,37.959 19.011,37.941 7.011,38.076 0.525,38.325 24.475,38.325 5.989,38.387 19.011,38.541 17.989,38.559 7.011,38.676 7.725,38.925 8.925,38.925 10.125,38.925 11.325,38.925 12.525,38.925 13.725,38.925 14.925,38.925 16.125,38.925 17.325,38.925 5.925,38.983 19.185,39.115 18.047,39.156 6.915,39.268 18.323,39.689 6.605,39.782 18.78,40.078 6.113,40.125 7.725,40.125 8.925,40.125 10.125,40.125 11.325,40.125 12.525,40.125 13.725,40.125 14.925,40.125 16.125,40.125 17.325,40.125 5.528,40.259 19.517,40.261 0.525,40.725 24.475,40.725 0.525,41.325 1.725,41.325 2.925,41.325 4.125,41.325 5.325,41.325 6.525,41.325 7.725,41.325 8.925,41.325 10.125,41.325 11.325,41.325 12.525,41.325 13.725,41.325 14.925,41.325 16.125,41.325 17.325,41.325 18.525,41.325 19.725,41.325 20.925,41.325 22.125,41.325 23.325,41.325 24.475,41.325 0.525,41.925 24.475,41.925 0.525,42.525 1.725,42.525 2.925,42.525 4.125,42.525 5.325,42.525 6.525,42.525 7.725,42.525 8.925,42.525 10.125,42.525 11.325,42.525 12.525,42.525 13.725,42.525 14.925,42.525 16.125,42.525 17.325,42.525 18.525,42.525 19.725,42.525 20.925,42.525 22.125,42.525 23.325,42.525 24.475,42.525 0.525,43.125 24.475,43.125 0.525,43.725 1.725,43.725 2.925,43.725 4.125,43.725 5.325,43.725 6.525,43.725 7.725,43.725 8.925,43.725 10.125,43.725 11.325,43.725 12.525,43.725 13.725,43.725 14.925,43.725 16.125,43.725 17.325,43.725 18.525,43.725 19.725,43.725 20.925,43.725 22.125,43.725 23.325,43.725 24.475,43.725 0.525,44.325 24.475,44.325 0.525,44.925 1.725,44.925 2.925,44.925 4.125,44.925 5.325,44.925 6.525,44.925 7.725,44.925 8.925,44.925 10.125,44.925 11.325,44.925 12.525,44.925 13.725,44.925 14.925,44.925 16.125,44.925 17.325,44.925 18.525,44.925 19.725,44.925 20.925,44.925 22.125,44.925 23.325,44.925 24.475,44.925 0.525,45.525 24.475,45.525 0.525,46.125 1.725,46.125 2.925,46.125 4.125,46.125 5.325,46.125 6.525,46.125 7.725,46.125 8.925,46.125 10.125,46.125 11.325,46.125 12.525,46.125 13.725,46.125 14.925,46.125 16.125,46.125 17.325,46.125 18.525,46.125 19.725,46.125 20.925,46.125 22.125,46.125 23.325,46.125 24.475,46.125 0.525,46.725 24.475,46.725 0.525,47.325 1.725,47.325 2.925,47.325 4.125,47.325 5.325,47.325 6.525,47.325 7.725,47.325 8.925,47.325 10.125,47.325 11.325,47.325 12.525,47.325 13.725,47.325 14.925,47.325 16.125,47.325 17.325,47.325 18.525,47.325 19.725,47.325 20.925,47.325 22.125,47.325 23.325,47.325 24.475,47.325 0.525,47.925 24.475,47.925 0.525,48.525 1.725,48.525 2.925,48.525 4.125,48.525 5.325,48.525 6.525,48.525 7.725,48.525 8.925,48.525 10.125,48.525 11.325,48.525 12.525,48.525 13.725,48.525 14.925,48.525 16.125,48.525 17.325,48.525 18.525,48.525 19.725,48.525 20.925,48.525 22.125,48.525 23.325,48.525 24.475,48.525 0.525,49.125 24.475,49.125 0.525,49.725 1.725,49.725 2.925,49.725 4.125,49.725 5.325,49.725 6.525,49.725 7.725,49.725 8.925,49.725 10.125,49.725 11.325,49.725 12.525,49.725 13.725,49.725 14.925,49.725 16.125,49.725 17.325,49.725 18.525,49.725 19.725,49.725 20.925,49.725 22.125,49.725 23.325,49.725 24.475,49.725 0.525,50.325 24.475,50.325 0.525,50.925 1.725,50.925 2.925,50.925 4.125,50.925 5.325,50.925 6.525,50.925 7.725,50.925 8.925,50.925 10.125,50.925 11.325,50.925 12.525,50.925 13.725,50.925 14.925,50.925 16.125,50.925 17.325,50.925 18.525,50.925 19.725,50.925 20.925,50.925 22.125,50.925 23.325,50.925 24.475,50.925 0.525,51.525 24.475,51.525 0.525,52.125 1.725,52.125 2.925,52.125 4.125,52.125 5.325,52.125 6.525,52.125 7.725,52.125 8.925,52.125 10.125,52.125 11.325,52.125 12.525,52.125 13.725,52.125 14.925,52.125 16.125,52.125 17.325,52.125 18.525,52.125 19.725,52.125 20.925,52.125 22.125,52.125 23.325,52.125 24.475,52.125 0.525,52.725 24.475,52.725 1.725,53.325 2.925,53.325 4.125,53.325 5.325,53.325 6.525,53.325 7.725,53.325 8.925,53.325 10.125,53.325 11.325,53.325 12.525,53.325 13.725,53.325 14.925,53.325 16.125,53.325 17.325,53.325 18.525,53.325 19.725,53.325 20.925,53.325 22.125,53.325 23.325,53.325 1,53.5 24,53.5 1.725,53.975 2.325,53.975 2.925,53.975 3.525,53.975 4.125,53.975 4.725,53.975 5.325,53.975 5.925,53.975 6.525,53.975 7.125,53.975 7.725,53.975 8.325,53.975 8.925,53.975 9.525,53.975 10.125,53.975 10.725,53.975 11.325,53.975 11.925,53.975 12.525,53.975 13.125,53.975 13.725,53.975 14.325,53.975 14.925,53.975 15.525,53.975 16.125,53.975 16.725,53.975 17.325,53.975 17.925,53.975 18.525,53.975 19.125,53.975 19.725,53.975 20.325,53.975 20.925,53.975 21.525,53.975 22.125,53.975 22.725,53.975 23.325,53.975
IN1: J3.1 T1.6 | length 15.8
  Top Layer w0.144: J3.1 5.5,14.75 ccw(c5.5,15.75) 6.5,15.75 6.5,23.71 cw(c7.5,23.71) 7.5,24.71 T1.6
IN2: J4.1 T1.4 | length 15.8
  Top Layer w0.144: J4.1 5.5,39.75 cw(c5.5,38.75) 6.5,38.75 6.5,30.79 ccw(c7.5,30.79) 7.5,29.79 T1.4

## Polygon pours and split planes (outlines as drawn)
GND on Int2 (GND) "NONET_L-01_P-001" (solid, remove dead copper, pour order 1): 0,54.5 25,54.5 25,0 0,0
GND on Int1 (GND) "NONET_L-01_P-001" (solid, remove dead copper, pour order 2): 0,54.5 25,54.5 25,0 0,0
GND on Int3 (GND) "NONET_L-01_P-001" (solid, remove dead copper, pour order 3): 0,54.5 25,54.5 25,0 0,0
GND on Int4 (GND) "NONET_L-01_P-001" (solid, remove dead copper, pour order 4): 0,54.5 25,54.5 25,0 0,0
GND on Bottom Layer "NONET_L-01_P-001" (solid, pour order 5): 0,54.5 25,54.5 25,0 0,0
GND on Top Layer "NONET_L-01_P-001" (solid, remove dead copper, pour order 0): 0,54.5 25,54.5 25,0 0,0

## Silkscreen, mask and mechanical layers (free items; w line width, h text height)
Top Overlay:
  region: 512 vertices and 0 holes, not listed, extent 9.761,46.556 15.239,51.503
  text "LISN Mate" at 8.4,51.951 h2
  text "JLCJLCJLCJLC" at 8.379,45.01 h1.5
  text "IN1" at 7.649,40.452 h2
  text "DM►" at 13.649,40.456 h2
  text "IN2" at 7.649,11.646 h2
  text "CM►" at 13.647,11.64 h2
  text "Designed by Peter Barnes" at 4.692,6.698 h1.4
  text "github.com/pe5er/lisn_mate" at 4.014,5.198 h1.4
  text "Remixed from CompuPhase LISN-mate" at 1.731,3.692 h1.4
  text "github.com/compuphase/LISN-mate" at 2.372,2.198 h1.4
Top Solder:
  lines w0.144: 2.5,14.75 5.5,14.75 ccw(c5.5,15.75) 6.5,15.75 6.5,23.71 cw(c7.5,23.71) 7.5,24.71 9.176,24.71 ; 2.5,39.75 5.5,39.75 cw(c5.5,38.75) 6.5,38.75 6.5,30.79 ccw(c7.5,30.79) 7.5,29.79 9.176,29.79 ; 8.926,27.25 10.5,27.25 cw(c10.5,25.25) 12.5,25.269 12.5,17.29 ccw(c15.04,17.29) 15.04,14.75 22.5,14.75 ; 15.824,24.71 17.5,24.71 ccw(c17.5,25.71) 18.5,25.71 18.5,38.75 cw(c19.5,38.75) 19.5,39.75 22.5,39.75
  lines w2: 0,2 ccw(c2,2) 2,0 23,0 ccw(c23,2) 25,2 25,52.5 ccw(c23,52.5) 23,54.5 2,54.5 ccw(c2,52.5) 0,52.5 0,2
Bottom Solder:
  the board outline again, w2
Board Outline:
  the board outline again, w1

## Text inside footprints (layer, text, board x,y; h text height)
J1: Mechanical 1 "PCB End" at 25.7,38.45 h0.8 r90; Mechanical 1 "PCB Thickness 1.6mm" at 38.5,36.15 h0.8 r90
J2: Mechanical 1 "PCB End" at 25.7,13.45 h0.8 r90; Mechanical 1 "PCB Thickness 1.6mm" at 38.5,11.15 h0.8 r90
J3: Mechanical 1 "PCB End" at -0.7,16.05 h0.8 r270; Mechanical 1 "PCB Thickness 1.6mm" at -13.5,18.35 h0.8 r270
J4: Mechanical 1 "PCB End" at -0.7,41.05 h0.8 r270; Mechanical 1 "PCB Thickness 1.6mm" at -13.5,43.35 h0.8 r270